# EAGLE board XC95144V0 (EAGLE 5.11)
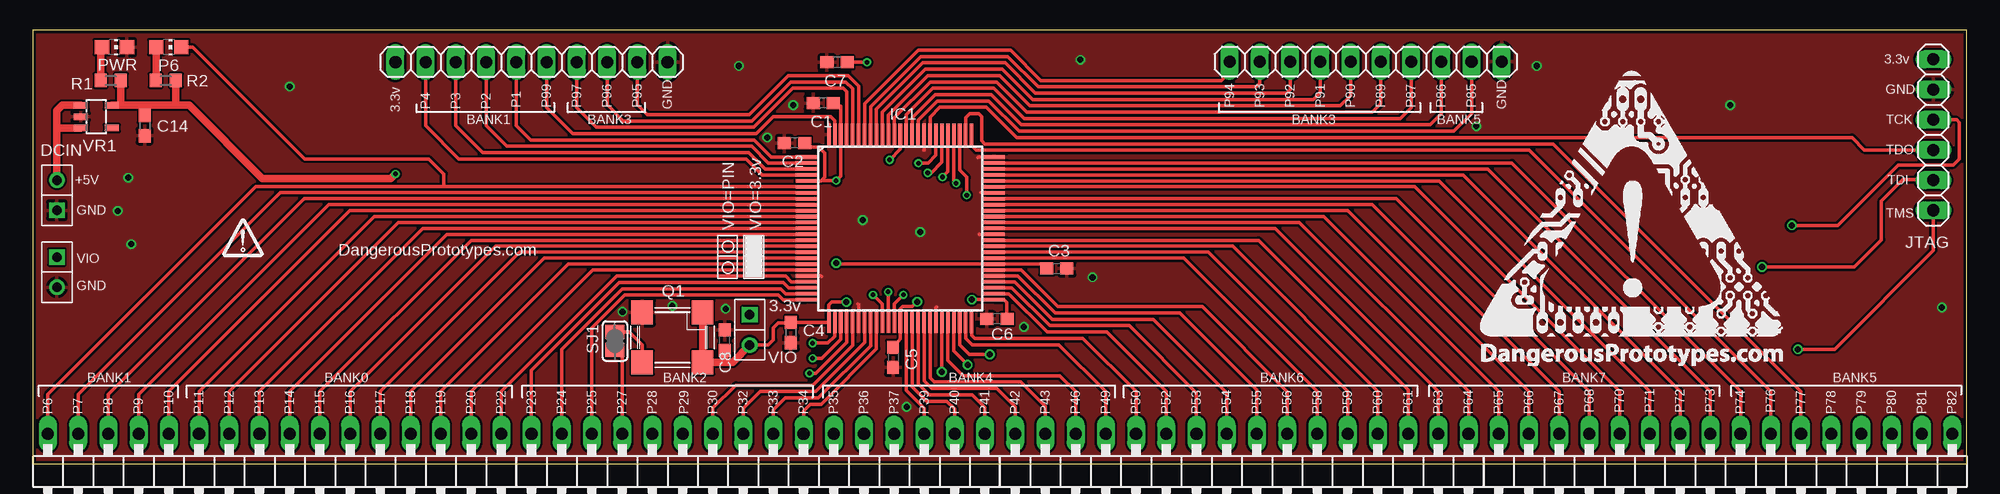
[diagram p0: board, top side]
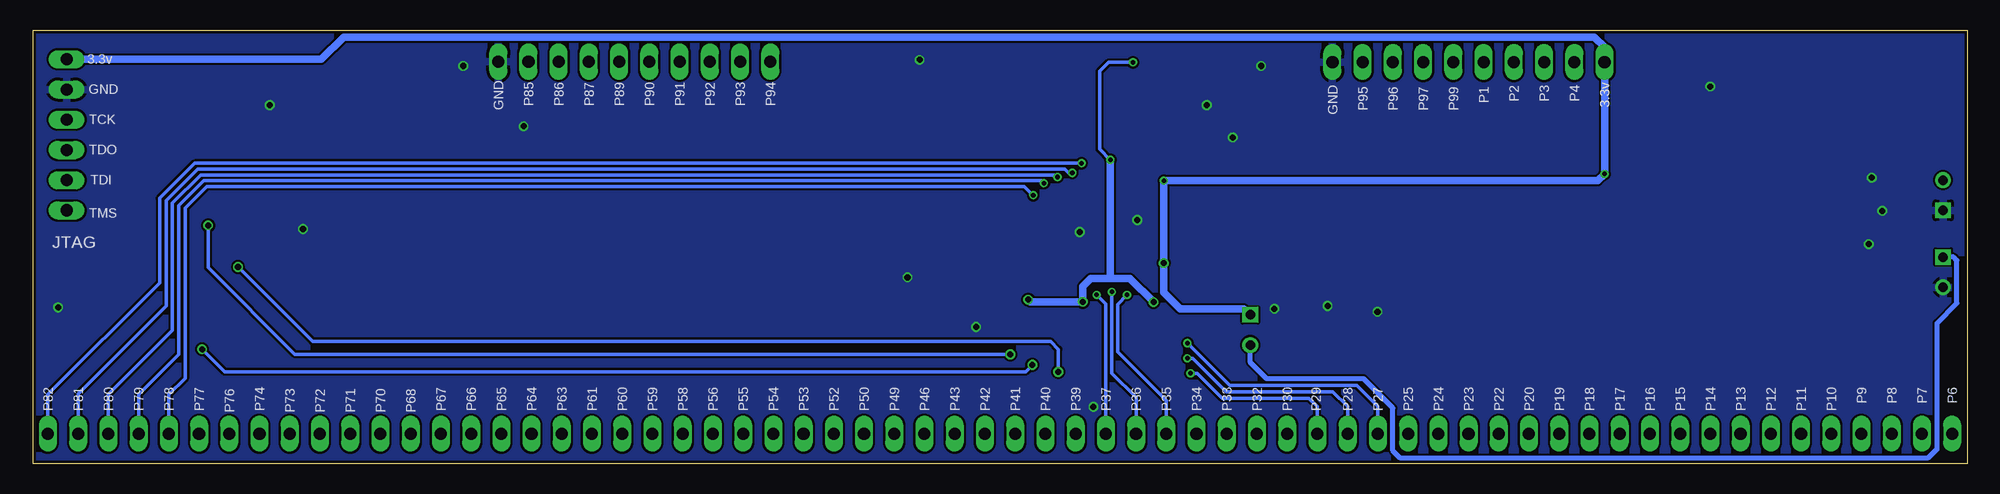
[diagram p1: board, bottom side, seen from below]

Size 162.54 x 36.5 mm. Coordinates in mm from the lower left corner, seen from the top.
Outline: 0,0 162.54,0 162.54,36.5 0,36.5 0,0
Copper layers (1*16): Top 0.035mm / dielectric 1.5mm / Bottom 0.035mm
Design rules "Fusion_eagle_rule_v1.1 *": minimum track width 6mil, minimum drill 12mil, track to track 7mil, track to pad 7mil, pad to pad 7mil, via to via 7mil, smd to smd 7mil, copper to edge 10mil, drill to drill 10mil, minimum pad ring 10mil, minimum via ring 6mil, stop-mask expansion 2mil, vias tented up to drill 100mil, thermal gap 10mil

## Footprints (pad centres in the part's own frame; a part is rotated, then mirrored left to right if it is on the bottom)
C603 = smd 1.1 x 1: 1 -0.85,0; 2 0.85,0
M1X2 = drill 0.8 square: 1 -1.27,0 | drill 0.8 round: 2 1.27,0
XC-TQ100 = smd 1.8 x 0.3: 1 -7.9,6; 2 -7.9,5.5; 3 -7.9,5; 4 -7.9,4.5; 5 -7.9,4; 6 -7.9,3.5; 7 -7.9,3; 8 -7.9,2.5; 9 -7.9,2; 10 -7.9,1.5; 11 -7.9,1; 12 -7.9,0.5; 13 -7.9,0; 14 -7.9,-0.5; 15 -7.9,-1; 16 -7.9,-1.5; 17 -7.9,-2; 18 -7.9,-2.5; 19 -7.9,-3; 20 -7.9,-3.5; 21 -7.9,-4; 22 -7.9,-4.5; 23 -7.9,-5; 24 -7.9,-5.5; 25 -7.9,-6; 51 7.9,-6; 52 7.9,-5.5; 53 7.9,-5; 54 7.9,-4.5; 55 7.9,-4; 56 7.9,-3.5; 57 7.9,-3; 58 7.9,-2.5; 59 7.9,-2; 60 7.9,-1.5; 61 7.9,-1; 62 7.9,-0.5; 63 7.9,0; 64 7.9,0.5; 65 7.9,1; 66 7.9,1.5; 67 7.9,2; 68 7.9,2.5; 69 7.9,3; 70 7.9,3.5; 71 7.9,4; 72 7.9,4.5; 73 7.9,5; 74 7.9,5.5; 75 7.9,6 | smd 0.3 x 1.8: 26 -6,-7.9; 27 -5.5,-7.9; 28 -5,-7.9; 29 -4.5,-7.9; 30 -4,-7.9; 31 -3.5,-7.9; 32 -3,-7.9; 33 -2.5,-7.9; 34 -2,-7.9; 35 -1.5,-7.9; 36 -1,-7.9; 37 -0.5,-7.9; 38 0,-7.9; 39 0.5,-7.9; 40 1,-7.9; 41 1.5,-7.9; 42 2,-7.9; 43 2.5,-7.9; 44 3,-7.9; 45 3.5,-7.9; 46 4,-7.9; 47 4.5,-7.9; 48 5,-7.9; 49 5.5,-7.9; 50 6,-7.9; 76 6,7.9; 77 5.5,7.9; 78 5,7.9; 79 4.5,7.9; 80 4,7.9; 81 3.5,7.9; 82 3,7.9; 83 2.5,7.9; 84 2,7.9; 85 1.5,7.9; 86 1,7.9; 87 0.5,7.9; 88 0,7.9; 89 -0.5,7.9; 90 -1,7.9; 91 -1.5,7.9; 92 -2,7.9; 93 -2.5,7.9; 94 -3,7.9; 95 -3.5,7.9; 96 -4,7.9; 97 -4.5,7.9; 98 -5,7.9; 99 -5.5,7.9; 100 -6,7.9
1X16/90 = drill 1.016 long: 1 -19.05,-3.81; 2 -16.51,-3.81; 3 -13.97,-3.81; 4 -11.43,-3.81; 5 -8.89,-3.81; 6 -6.35,-3.81; 7 -3.81,-3.81; 8 -1.27,-3.81; 9 1.27,-3.81; 10 3.81,-3.81; 11 6.35,-3.81; 12 8.89,-3.81; 13 11.43,-3.81; 14 13.97,-3.81; 15 16.51,-3.81; 16 19.05,-3.81
1X10 = drill 1.016 long: 1 -11.43,0; 2 -8.89,0; 3 -6.35,0; 4 -3.81,0; 5 -1.27,0; 6 1.27,0; 7 3.81,0; 8 6.35,0; 9 8.89,0; 10 11.43,0
1X06 = drill 1.016 long: 1 -6.35,0; 2 -3.81,0; 3 -1.27,0; 4 1.27,0; 5 3.81,0; 6 6.35,0
CHIP-LED0805 = smd 1.2 x 1.2: A 0,-1.05; C 0,1.05
OSCILLATOR_7X5_SMD = smd 1.8 x 2: 1 -2.54,-2.1; 2 2.54,-2.1; 3 2.54,2.1; 4 -2.54,2.1
R603 = smd 1 x 1.1: 1 -0.85,0; 2 0.85,0
SJ = smd 1.168 x 1.6: 1 -0.762,0; 2 0.762,0
SOT-23-5 = smd 0.55 x 1.2: 1 -0.95,-1.3; 2 0,-1.3; 3 0.95,-1.3; 4 0.95,1.3; 5 -0.95,1.3

## Placement (x,y rotation side)
C1  0.1uF  [C603]  66.42,30.35 180 top
C2  0.1uF  [C603]  64.01,27 180 top
C3  0.1uF  [C603]  86.06,16.43 0 top
C4  0.1uF  [C603]  63.7,11.05 270 top
C5  0.1uF  [C603]  72.29,8.97 270 top
C6  0.1uF  [C603]  81.03,12.19 180 top
C7  0.1uF  [C603]  67.59,33.78 180 top
C8  0.1uF  [C603]  58.17,10.41 90 top
C14  1uF  [C603]  9.4,28.45 270 top
DCIN  HEADER1X2PTH  [M1X2]  2.03,22.61 90 top
IC1  XC95144XL_TQ100  [XC-TQ100]  72.9,19.81 0 top
JP1  [1X16/90]  20.32,-1.27 180 top
JP2  [1X16/90]  101.6,-1.27 180 top
JP3  [1X10]  41.91,33.81 0 top
JP4  [1X10]  112.01,33.83 0 top
JP7  [1X16/90]  60.96,-1.27 180 top
JP8  [1X16/90]  142.24,-1.27 180 top
JTAG  [1X06]  159.72,27.69 90 top
P6  P4  [CHIP-LED0805]  11.43,35.05 270 top
PWR  P4  [CHIP-LED0805]  6.86,35.05 270 top
Q1  OSC-OSCILLATOR  [OSCILLATOR_7X5_SMD]  53.75,10.64 180 top
R1  [R603]  6.55,32.26 180 top
R2  [R603]  11.18,32.26 180 top
SJ1  [SJ]  48.92,10.34 270 top
U$1  DINA4_L  [DP_LOGO]  17.65,18.03 0 top
U$2  [DP_LOGO_ART_1X1]  121.67,8.26 0 top
VIO  HEADER1X2PTH  [M1X2]  60.25,11.28 270 top
VIO1  HEADER1X2PTH  [M1X2]  2.03,16.13 270 top
VR1  [SOT-23-5]  5.33,29.21 270 top

## Library data of the parts
C1-C8 C14 DCIN Q1 R1 R2 U$2 VIO VIO1 VR1 = dp_devices
IC1 = XC
JP1-JP4 JP7 JP8 JTAG = pinhead
P6 PWR = led
SJ1 = jumper
U$1 = dp_devices; URL2: DangerousPrototypes.com

## Nets
3.3V: C1.1 C2.1 C3.1 C14.1 IC1.5 IC1.57 IC1.98 JP3.1 JTAG.6 R1.1 R2.1 VIO.1 VR1.5
DCIN: DCIN.2 VR1.1 VR1.3
GND: C1.2 C2.2 C3.2 C4.2 C5.2 C6.2 C7.2 C8.2 C14.2 DCIN.1 IC1.21 IC1.31 IC1.44 IC1.62 IC1.69 IC1.75 IC1.84 IC1.100 JP3.10 JP4.10 JTAG.5 PWR.C Q1.2 VIO1.2 VR1.2
N$1: PWR.A R1.2
N$2: P6.A R2.2
N$5: Q1.3 SJ1.1
PB00_01: IC1.11 JP1.11
PB00_02: IC1.12 JP1.10
PB00_04: IC1.13 JP1.9
PB00_05: IC1.14 JP1.8
PB00_07: IC1.15 JP1.7
PB00_08: IC1.16 JP1.6
PB00_10: IC1.17 JP1.5
PB00_11: IC1.18 JP1.4
PB00_13: IC1.19 JP1.3
PB00_14: IC1.20 JP1.2
PB00_16/GCK1: IC1.22 JP1.1
PB01_01/GSR: IC1.99 JP3.6
PB01_04/GTS3: IC1.1 JP3.5
PB01_05/GTS4: IC1.2 JP3.4
PB01_07/GTS1: IC1.3 JP3.3
PB01_08/GTS2: IC1.4 JP3.2
PB01_10: IC1.6 JP1.16 P6.C
PB01_11: IC1.7 JP1.15
PB01_13: IC1.8 JP1.14
PB01_14: IC1.9 JP1.13
PB01_16: IC1.10 JP1.12
PB02_01/GCK2: IC1.23 JP7.16
PB02_04: IC1.24 JP7.15
PB02_05: IC1.25 JP7.14
PB02_07/GCK3: IC1.27 JP7.13 SJ1.2
PB02_08: IC1.28 JP7.12
PB02_10: IC1.29 JP7.11
PB02_11: IC1.30 JP7.10
PB02_13: IC1.32 JP7.9
PB02_14: IC1.33 JP7.8
PB02_16: IC1.34 JP7.7
PB03_01: IC1.87 JP4.7
PB03_04: IC1.89 JP4.6
PB03_05: IC1.90 JP4.5
PB03_07: IC1.91 JP4.4
PB03_08: IC1.92 JP4.3
PB03_10: IC1.93 JP4.2
PB03_11: IC1.94 JP4.1
PB03_13: IC1.95 JP3.9
PB03_14: IC1.96 JP3.8
PB03_16: IC1.97 JP3.7
PB04_01: IC1.35 JP7.6
PB04_04: IC1.36 JP7.5
PB04_05: IC1.37 JP7.4
PB04_07: IC1.39 JP7.3
PB04_08: IC1.40 JP7.2
PB04_10: IC1.41 JP7.1
PB04_11: IC1.42 JP2.16
PB04_13: IC1.43 JP2.15
PB04_14: IC1.46 JP2.14
PB04_16: IC1.49 JP2.13
PB05_01: IC1.74 JP8.8
PB05_04: IC1.76 JP8.7
PB05_05: IC1.77 JP8.6
PB05_07: IC1.78 JP8.5
PB05_08: IC1.79 JP8.4
PB05_10: IC1.80 JP8.3
PB05_11: IC1.81 JP8.2
PB05_13: IC1.82 JP8.1
PB05_14: IC1.85 JP4.9
PB05_16: IC1.86 JP4.8
PB06_01: IC1.50 JP2.12
PB06_04: IC1.52 JP2.11
PB06_05: IC1.53 JP2.10
PB06_07: IC1.54 JP2.9
PB06_08: IC1.55 JP2.8
PB06_10: IC1.56 JP2.7
PB06_11: IC1.58 JP2.6
PB06_13: IC1.59 JP2.5
PB06_14: IC1.60 JP2.4
PB06_16: IC1.61 JP2.3
PB07_01: IC1.63 JP2.2
PB07_04: IC1.64 JP2.1
PB07_05: IC1.65 JP8.16
PB07_07: IC1.66 JP8.15
PB07_08: IC1.67 JP8.14
PB07_10: IC1.68 JP8.13
PB07_11: IC1.70 JP8.12
PB07_13: IC1.71 JP8.11
PB07_14: IC1.72 JP8.10
PB07_16: IC1.73 JP8.9
TCK: IC1.48 JTAG.4
TDI: IC1.45 JTAG.2
TDO: IC1.83 JTAG.3
TMS: IC1.47 JTAG.1
VCCIO: C4.1 C5.1 C6.1 C7.1 C8.1 IC1.26 IC1.38 IC1.51 IC1.88 Q1.1 Q1.4 VIO1.1 VIO.2

## Tracks (layer width: path | path; a pad name or v marks a point on that pad's centre or on a via)
3.3V  (via drill 0.38, 0.51)
  Top 0.305: C1.1 67.9,30.08 IC1.98 67.9,24.21 v67.51,23.82 66.24,23.82 | C3.1 84.9,16.81 IC1.57 67.59,16.81 v67.51,16.89 | IC1.5 66.23,23.81 66.24,23.82 | 66.24,23.82 66.55,24.13 66.55,26.16 66.04,26.67 65.29,26.67 C2.1 | 8.32,30.23 8.38,30.16 9.33,30.16 9.4,30.23 C14.1
  Top 0.61: VR1.5 7.37,30.16 | 7.37,30.16 8.38,30.16 12.19,30.16 | 12.19,30.16 13.15,30.16 19.3,24 30.1,24 v30.48,24.38 | R1.1 7.4,30.2 7.37,30.16 | R2.1 12.03,30.33 12.19,30.16
  Bottom 0.61: VIO.1 60.81,13.06 66.14,13.06 67.51,14.43 v67.51,16.89 v67.51,23.82 31.04,23.82 v30.48,24.38 JP3.1 30.48,35.05 31.34,35.92 136.42,35.92 138.3,34.04 JTAG.6
DCIN
  Top 0.61: DCIN.2 2.03,28.45 | 2.03,28.45 2.03,29.72 2.47,30.16 VR1.1 | VR1.3 2.22,28.26 2.03,28.45
GND  (via drill 0.51)
  Top 0.305: IC1.21 66.23,15.81 66.29,15.75 | IC1.62 79.76,19.31 | 79.76,19.31 79.76,19.3 | IC1.75 79.43,25.81 79.4,25.78 | IC1.84 74.9,26.41 74.88,26.39 | IC1.69 79.66,22.81 79.65,22.81 | 79.76,19.31 79.55,19.31 79.53,19.33 | IC1.31 69.4,13.41 69.34,13.46 | IC1.44 75.9,13.16 75.95,13.21
  other vias: 21.59,31.75 49.56,12.8 53.75,13.28 58.22,13.06 74.57,19.51 59.33,33.48 126.39,33.48 89.05,15.7 83.29,11.53 63.91,30.18 61.72,27.46 73.43,4.8 69.75,20.52 88.04,33.99 139.85,19.76 142.65,30.18 160.43,13.16 7.14,21.29 8.28,18.49 8.03,24.08 121.31,28.4
  pour Top: 0,36.07 162.56,36.07 162.56,0 0,0
  pour Bottom: 0,0 162.56,0 162.56,36.07 0,36.07
N$1
  Top 0.61: R1.2 5.7,34.95 PWR.A
N$2
  Top 0.61: P6.A 10.38,32.31 R2.2
N$5
  Top 0.305: SJ1.1 50.11,11.1 51.21,10.01 Q1.3
PB00_01
  Top 0.305: IC1.11 28.69,20.81 13.97,6.1 JP1.11
PB00_02
  Top 0.305: IC1.12 30.73,20.31 16.51,6.1 JP1.10
PB00_04
  Top 0.305: IC1.13 32.77,19.81 19.05,6.1 JP1.9
PB00_05
  Top 0.305: IC1.14 34.81,19.31 21.59,6.1 JP1.8
PB00_07
  Top 0.305: JP1.7 24.13,6.1 36.85,18.81 IC1.15
PB00_08
  Top 0.305: IC1.16 38.89,18.31 26.67,6.1 JP1.6
PB00_10
  Top 0.305: IC1.17 40.93,17.81 29.21,6.1 JP1.5
PB00_11
  Top 0.305: IC1.18 42.97,17.31 31.75,6.1 JP1.4
PB00_13
  Top 0.305: IC1.19 45.01,16.81 34.29,6.1 JP1.3
PB00_14
  Top 0.305: IC1.20 47.05,16.31 36.83,6.1 JP1.2
PB00_16/GCK1
  Top 0.305: JP1.1 39.37,6.1 49.07,15.8 63.27,15.8 63.76,15.31 IC1.22
PB01_01/GSR
  Top 0.305: IC1.99 67.4,28.87 67.06,29.21 62.23,29.21 60.81,27.79 45.36,27.79 43.18,29.97 JP3.6
PB01_04/GTS3
  Top 0.305: IC1.1 62.07,25.81 60.63,27.25 41.83,27.25 40.64,28.45 JP3.5
PB01_05/GTS4
  Top 0.305: IC1.2 61.81,25.31 60.4,26.72 39.83,26.72 38.1,28.45 JP3.4
PB01_07/GTS1
  Top 0.305: IC1.3 61.55,24.81 60.17,26.19 37.82,26.19 35.56,28.45 JP3.3
PB01_08/GTS2
  Top 0.305: IC1.4 61.29,24.31 59.94,25.65 35.81,25.65 33.02,28.45 JP3.2
PB01_10
  Top 0.305: 34.54,23.31 18.74,23.31 1.27,5.84 JP1.16 | 34.54,23.31 IC1.6 | P6.C 13.46,35.05 22.86,25.65 33.27,25.65 34.54,24.38 34.54,23.31
PB01_11
  Top 0.305: IC1.7 20.78,22.81 3.81,5.84 JP1.15
PB01_13
  Top 0.305: IC1.8 22.82,22.31 6.35,5.84 JP1.14
PB01_14
  Top 0.305: IC1.9 24.86,21.81 8.89,5.84 JP1.13
PB01_16
  Top 0.305: IC1.10 26.65,21.31 11.43,6.1 JP1.12
PB02_01/GCK2
  Top 0.305: JP7.16 41.91,7.87 49.3,15.27 63.07,15.27 63.52,14.81 IC1.23
PB02_04
  Top 0.305: IC1.24 63.28,14.31 62.87,14.73 49.53,14.73 44.45,9.65 JP7.15
PB02_05
  Top 0.305: IC1.25 63.05,13.81 62.66,14.2 49.76,14.2 46.99,11.43 JP7.14
PB02_07/GCK3  (via drill 0.38)
  Top 0.305: IC1.27 67.4,10.73 67.37,10.73 66.8,10.16 v65.53,10.16 | JP7.13 49.53,8.97 SJ1.2
  Bottom 0.305: 49.55,2.56 JP7.13 49.53,4.83 51.31,6.6 61.98,6.6 v65.53,10.16
PB02_08  (via drill 0.38)
  Top 0.305: IC1.28 67.9,10.49 66.29,8.89 v65.53,8.89
  Bottom 0.305: v65.53,8.89 65.1,8.89 62.28,6.07 53.31,6.07 52.07,4.83 JP7.12
PB02_10  (via drill 0.38)
  Top 0.305: IC1.29 68.4,10.23 65.79,7.62 v65.28,7.62
  Bottom 0.305: v65.28,7.62 64.69,7.62 62.61,5.54 55.32,5.54 54.61,4.83 JP7.11
PB02_11
  Top 0.305: IC1.30 68.9,9.97 65.56,6.63 59.08,6.63 57.15,4.7 JP7.10
PB02_13
  Top 0.305: IC1.32 69.9,10.21 65.79,6.1 61.11,6.1 59.69,4.67 JP7.9
PB02_14
  Top 0.305: IC1.33 70.4,9.95 66.02,5.56 63.25,5.56 62.23,4.55 JP7.8
PB02_16
  Top 0.305: IC1.34 70.9,9.68 66.24,5.03 65.33,5.03 64.77,4.47 JP7.7
PB03_01
  Top 0.305: IC1.87 73.4,29.38 75.62,31.6 80.77,31.6 83.31,29.06 114.91,29.06 115.82,29.97 JP4.7
PB03_04
  Top 0.305: IC1.89 72.4,29.12 75.41,32.13 81,32.13 83.54,29.59 112.57,29.59 113.28,30.3 JP4.6
PB03_05
  Top 0.305: IC1.90 71.9,29.35 75.21,32.66 81.25,32.66 83.8,30.12 109.88,30.12 110.74,30.99 JP4.5
PB03_07
  Top 0.305: IC1.91 71.4,29.59 75.01,33.2 81.48,33.2 84.02,30.66 107.62,30.66 108.2,31.24 JP4.4
PB03_08
  Top 0.305: IC1.92 70.9,29.83 74.8,33.73 81.71,33.73 84.25,31.19 105.36,31.19 105.66,31.5 JP4.3
PB03_10
  Top 0.305: IC1.93 70.4,30.06 74.6,34.27 81.94,34.27 84.48,31.73 102.82,31.73 103.12,32.03 JP4.2
PB03_11
  Top 0.305: IC1.94 69.9,30.3 74.4,34.8 82.17,34.8 84.71,32.26 99.87,32.26 100.58,32.97 JP4.1
PB03_13
  Top 0.305: IC1.95 69.4,31.8 68.53,32.66 63.48,32.66 60.2,29.39 51.64,29.39 50.8,30.23 JP3.9
PB03_14
  Top 0.305: IC1.96 68.9,31.56 68.33,32.13 63.68,32.13 60.4,28.85 49.63,28.85 48.26,30.23 JP3.8
PB03_16
  Top 0.305: IC1.97 68.4,31.32 68.12,31.6 63.88,31.6 60.6,28.32 47.37,28.32 45.72,29.97 JP3.7
PB04_01  (via drill 0.38)
  Top 0.305: IC1.35 71.4,13.44 v70.61,14.22
  Bottom 0.305: JP7.6 67.31,5.33 71.4,9.42 71.4,13.44 v70.61,14.22
PB04_04  (via drill 0.38)
  Top 0.305: IC1.36 71.9,14.46 v71.88,14.48
  Bottom 0.305: v71.88,14.48 71.88,7.62 69.85,5.59 JP7.5
PB04_05  (via drill 0.38)
  Top 0.305: IC1.37 72.4,13.47 v73.15,14.22
  Bottom 0.305: v73.15,14.22 72.39,13.46 JP7.4
PB04_07
  Top 0.305: IC1.39 73.4,6.21 74.93,4.67 JP7.3
PB04_08
  Top 0.305: IC1.40 73.9,6.49 75.11,5.28 76.81,5.28 77.47,4.62 JP7.2
PB04_10
  Top 0.305: IC1.41 74.4,6.75 75.34,5.82 78.97,5.82 80.01,4.78 JP7.1
PB04_11
  Top 0.305: IC1.42 74.9,6.99 75.54,6.35 81,6.35 82.55,4.8 JP2.16
PB04_13
  Top 0.305: IC1.43 75.4,7.25 75.77,6.88 83.03,6.88 85.09,4.83 JP2.15
PB04_14
  Top 0.305: JP2.14 87.63,6.1 86.31,7.42 78.18,7.42 76.9,8.7 IC1.46
PB04_16
  Top 0.305: IC1.49 78.4,10.58 78.94,10.03 86.23,10.03 90.17,6.1 JP2.13
PB05_01
  Top 0.305: IC1.74 124.29,25.31 143.51,6.1 JP8.8
PB05_04
  Top 0.305: IC1.76 78.9,26.77 79.27,26.39 125.75,26.39 146.05,6.1 JP8.7
PB05_05
  Top 0.305: IC1.77 78.4,29.12 78.74,29.46 79.5,29.46 79.76,29.21 79.76,27.18 80.01,26.92 127.76,26.92 148.59,6.1 JP8.6
PB05_07  (via drill 0.38)
  Top 0.305: IC1.78 77.9,24.72 78.49,24.13 v78.49,22.61
  Bottom 0.305: v78.49,22.61 78.54,22.61 79.25,23.32 147.96,23.32 149.76,21.51 149.76,7.21 151.13,5.84 JP8.5
PB05_08  (via drill 0.38)
  Top 0.305: IC1.79 77.4,23.82 v77.6,23.62
  Bottom 0.305: v77.6,23.62 77.8,23.82 148.21,23.82 150.29,21.74 150.29,9.22 153.67,5.84 JP8.4
PB05_10  (via drill 0.38)
  Top 0.305: IC1.80 76.9,24.57 v76.45,24.13
  Bottom 0.305: v76.45,24.13 76.63,24.31 148.46,24.31 150.82,21.95 150.82,11.23 156.21,5.84 JP8.3
PB05_11  (via drill 0.38)
  Top 0.305: IC1.81 76.4,25.39 75.49,24.49 v75.21,24.49
  Bottom 0.305: v75.21,24.49 75.49,24.49 75.82,24.82 148.69,24.82 151.36,22.15 151.36,13.28 158.75,5.89 JP8.2
PB05_13  (via drill 0.38)
  Top 0.305: IC1.82 75.9,25.96 75.23,25.3 v74.42,25.3
  Bottom 0.305: JP8.1 161.29,5.84 151.89,15.24 151.89,22.35 148.95,25.3 v74.42,25.3
PB05_14
  Top 0.305: IC1.85 74.4,28.91 76.02,30.53 80.34,30.53 82.88,27.99 119.43,27.99 120.9,29.46 JP4.9
PB05_16
  Top 0.305: IC1.86 73.9,29.14 75.82,31.06 80.54,31.06 83.08,28.52 117.42,28.52 118.36,29.46 JP4.8
PB06_01
  Top 0.305: IC1.50 78.9,10.81 79.15,10.57 88.24,10.57 92.71,6.1 JP2.12
PB06_04
  Top 0.305: IC1.52 82.03,14.31 85.24,11.1 90.25,11.1 95.25,6.1 JP2.11
PB06_05
  Top 0.305: IC1.53 82.27,14.81 85.45,11.63 92.13,11.63 97.79,5.97 JP2.10
PB06_07
  Top 0.305: IC1.54 82.53,15.31 85.67,12.17 94.16,12.17 100.33,5.99 JP2.9
PB06_08
  Top 0.305: IC1.55 82.79,15.81 85.9,12.7 96.39,12.7 102.87,6.22 JP2.8
PB06_10
  Top 0.305: IC1.56 83.05,16.31 86.13,13.23 98.27,13.23 105.44,6.07 105.44,2.56 JP2.7
PB06_11
  Top 0.305: IC1.58 96.73,17.31 107.95,6.1 JP2.6
PB06_13
  Top 0.305: IC1.59 98.8,17.81 110.49,6.12 JP2.5
PB06_14
  Top 0.305: IC1.60 100.84,18.31 113.03,6.12 JP2.4
PB06_16
  Top 0.305: IC1.61 103.01,18.81 115.57,6.25 JP2.3
PB07_01
  Top 0.305: IC1.63 104.39,19.81 118.11,6.1 JP2.2
PB07_04
  Top 0.305: IC1.64 106.43,20.31 120.65,6.1 JP2.1
PB07_05
  Top 0.305: IC1.65 108.47,20.81 123.19,6.1 JP8.16
PB07_07
  Top 0.305: IC1.66 110.51,21.31 125.73,6.1 JP8.15
PB07_08
  Top 0.305: IC1.67 112.55,21.81 128.27,6.1 JP8.14
PB07_10
  Top 0.305: IC1.68 114.59,22.31 130.81,6.1 JP8.13
PB07_11
  Top 0.305: IC1.70 116.13,23.31 133.35,6.1 JP8.12
PB07_13
  Top 0.305: IC1.71 118.17,23.81 135.89,6.1 JP8.11
PB07_14
  Top 0.305: IC1.72 120.21,24.31 138.43,6.1 JP8.10
PB07_16
  Top 0.305: IC1.73 122.25,24.81 140.97,6.1 JP8.9
TCK  (via drill 0.51)
  Top 0.305: IC1.48 77.9,10.01 78.69,9.22 v80.42,9.22 | v147.83,20.07 151.66,20.07 156.74,25.15 161.39,25.15 161.9,25.65 161.9,28.73 161.67,28.96 JTAG.4
  Bottom 0.305: v80.42,9.22 140.54,9.22 147.83,16.51 v147.83,20.07
TDI  (via drill 0.51)
  Top 0.305: IC1.45 76.4,7.77 v76.38,7.75 | v145.31,16.56 153.06,16.56 155.35,18.85 155.35,22.12 157.12,23.9 159.69,23.9 JTAG.2
  Bottom 0.305: v76.38,7.75 76.38,9.65 77.01,10.29 139.04,10.29 v145.31,16.56
TDO
  Top 0.305: IC1.83 75.4,29.17 76.22,30 80.14,30 82.68,27.46 152.88,27.46 153.92,26.42 JTAG.3
TMS  (via drill 0.51)
  Top 0.305: IC1.47 77.4,9.49 v78.56,8.33 | v148.34,9.65 151.41,9.65 159.72,17.96 JTAG.1
  Bottom 0.305: v78.56,8.33 78.56,8.31 79.12,7.75 146.43,7.75 v148.34,9.65
VCCIO  (via drill 0.38, 0.51)
  Top 0.305: C5.1 72.9,10.5 IC1.38 72.9,13.06 73.1,13.26 73.91,13.26 74.3,13.64 v74.32,13.64 | v70.1,33.78 C7.1 | IC1.88 72.9,26.47 v72.01,25.58 | IC1.26 | C4.1 63.68,11.87 | C4.1 66.89,11.9 IC1.26 | C6.1 81.86,12.2 81.86,13.59 81.64,13.81 IC1.51 v78.92,13.82 | VIO.2 61.82,10.01 62.23,10.41 62.23,11.43 62.66,11.86 63.67,11.86 C4.1 | IC1.26 66.9,13.38 67.13,13.61 v68.38,13.61
  Top 0.61: 56.64,12.95 56.43,12.74 Q1.1 Q1.4 58.17,8.54 | VIO.2 58.84,8.54 58.17,8.54 | 58.17,8.54 C8.1
  Bottom 0.305: v70.1,33.78 72.14,33.78 72.9,33.02 72.9,26.47 v72.01,25.58
  Bottom 0.406: VIO.2 60.25,8.53 58.88,7.16 50.72,7.16 48.26,4.7 48.26,1.12 47.62,0.48 3.33,0.48 2.54,1.27 2.54,11.84 0.86,13.51 0.86,17.12 1.14,17.4 VIO1.1
  Bottom 0.61: v68.38,13.61 70.36,15.6 71.88,15.6 | 71.88,15.6 73.64,15.6 74.32,14.91 v74.32,13.64 78.74,13.64 v78.92,13.82 | v72.01,25.58 72.01,15.72 71.88,15.6

## Text on the board
tNames: 3.3v | GND | 3.3v | P4 | P3 | P2 | P1 | P99 | P97 | P96 | P95 | GND | P94 | P93 | P92 | P91 | P90 | P89 | P87 | P86 | P85 | GND | BANK1 | BANK3 | BANK3 | BANK5 | TCK | TDO | +5V | TDI | GND | TMS | VIO=PIN | VIO=3.3v | DangerousPrototypes.com | JTAG | VIO | GND | 3.3v | BANK1 | BANK0 | BANK2 | BANK4 | BANK6 | BANK7 | BANK5 | P6 | P7 | P8 | P9 | P10 | P11 | P12 | P13 | P14 | P15 | P16 | P17 | P18 | P19 | P20 | P22 | P23 | P24 | P25 | P27 | P28 | P29 | P30 | P32 | P33 | P34 | P35 | P36 | P37 | P39 | P40 | P41 | P42 | P43 | P46 | P49 | P50 | P52 | P53 | P54 | P55 | P56 | P58 | P59 | P60 | P61 | P63 | P64 | P65 | P66 | P67 | P68 | P70 | P71 | P72 | P73 | P74 | P76 | P77 | P78 | P79 | P80 | P81 | P82
bNames: 3.3v | 3.3v | P4 | P3 | P2 | P1 | P99 | P97 | P96 | P95 | GND | P94 | P93 | P92 | P91 | P90 | P89 | P87 | P86 | P85 | GND | GND | TCK | TDO | TDI | TMS | JTAG | P6 | P7 | P8 | P9 | P10 | P11 | P12 | P13 | P14 | P15 | P16 | P17 | P18 | P19 | P20 | P22 | P23 | P24 | P25 | P27 | P28 | P29 | P30 | P32 | P33 | P34 | P35 | P36 | P37 | P39 | P40 | P41 | P42 | P43 | P46 | P49 | P50 | P52 | P53 | P54 | P55 | P56 | P58 | P59 | P60 | P61 | P63 | P64 | P65 | P66 | P67 | P68 | P70 | P71 | P72 | P73 | P74 | P76 | P77 | P78 | P79 | P80 | P81 | P82